# Altium PCB AT32UC3B0256 Breakout.PcbDoc
Units mm, origin at the board's own origin, x right, y up, seen from the top; angles counter-clockwise.
Board outline 50 x 50 mm, 2 copper layers (Top Layer, Bottom Layer); 24 components, 56 nets, 179 pads, 0 vias.
Unrouted connection lines stored in the file: 99.
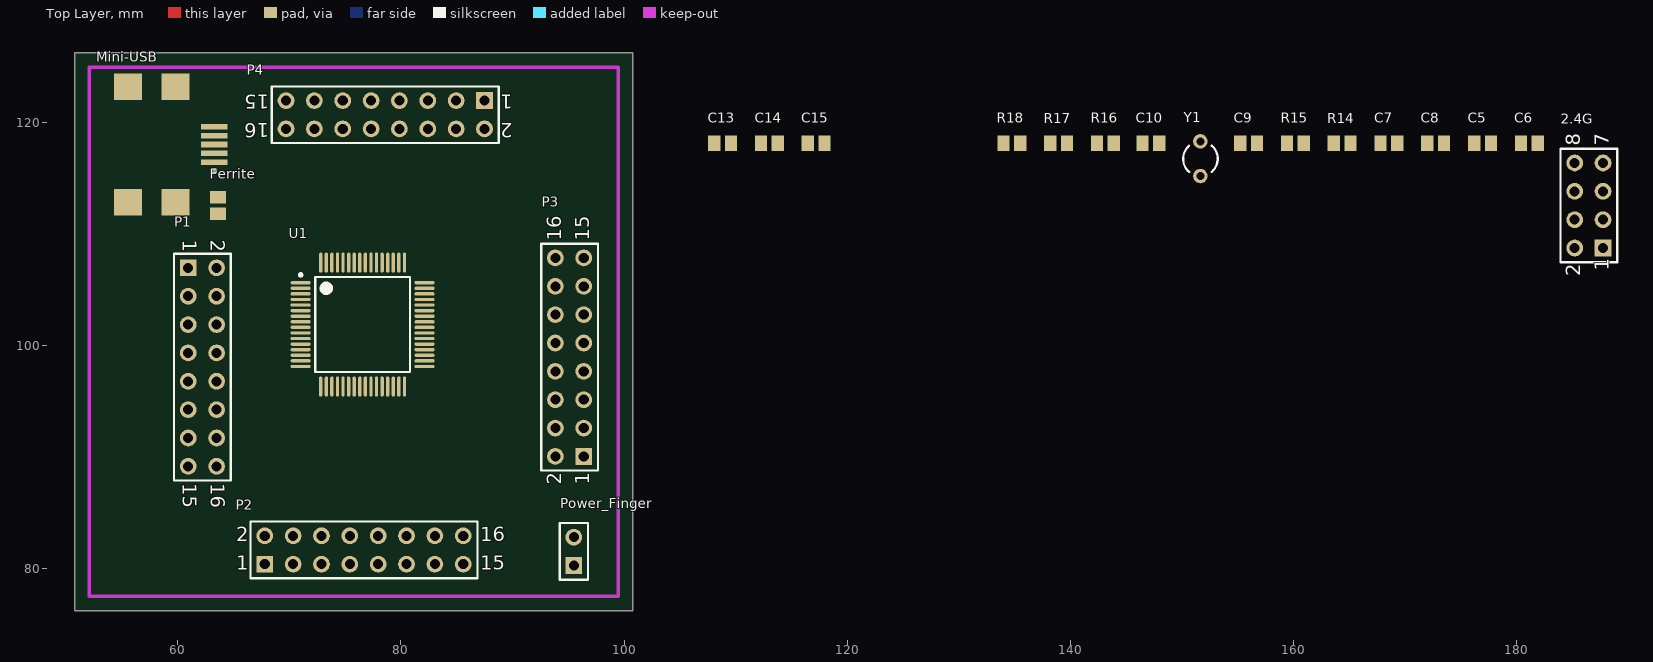
[diagram p0: Top Layer view]
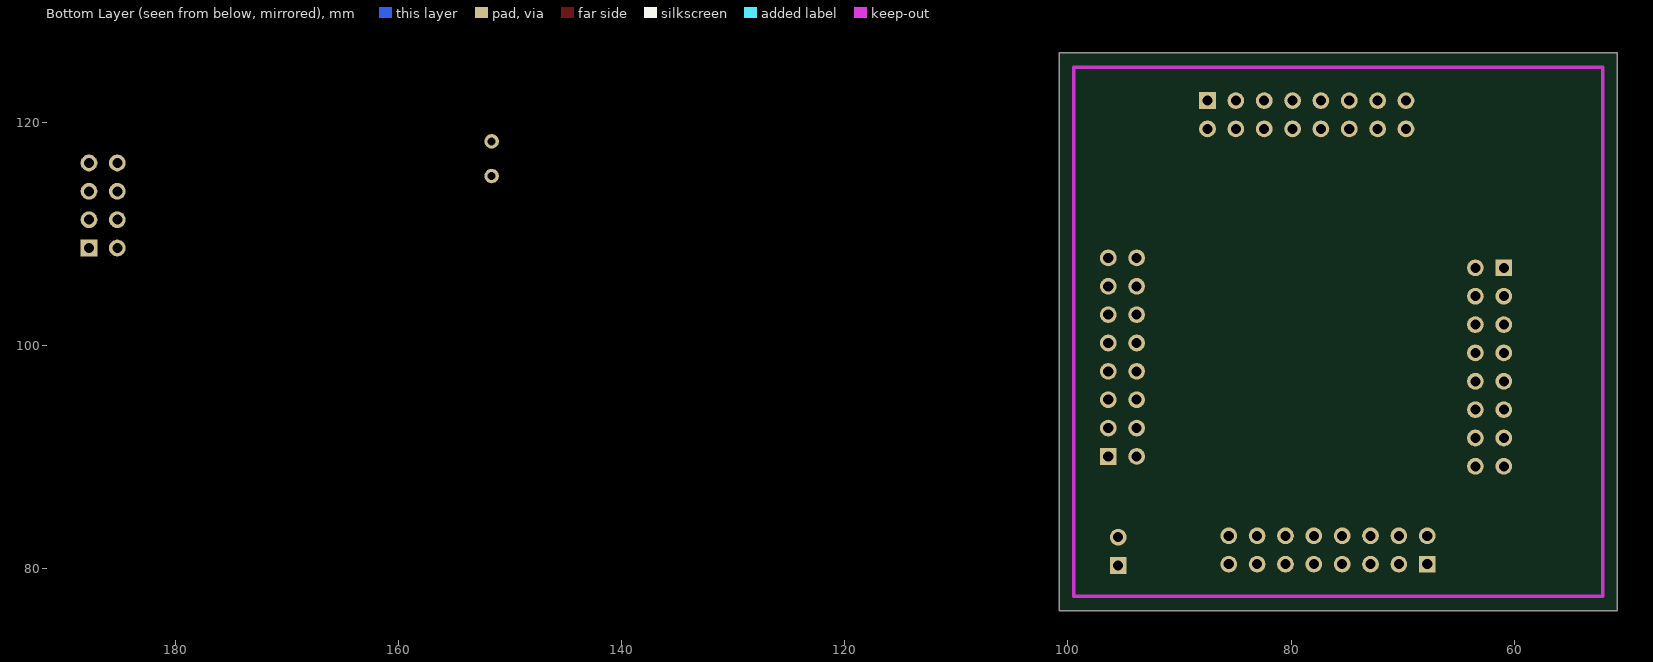
[diagram p1: Bottom Layer view, seen from below]

## Layer stack, top to bottom
Top Layer: signal copper 0.0356
Dielectric: dielectric 0.32, FR-4, Dk 4.8
Bottom Layer: signal copper 0.0356

## Board outline
50.8,76.2 100.8,76.2 100.8,126.2 50.8,126.2

## Design rules (kind name [scope] priority, off if disabled: settings)
Clearance "Polygon Clearance" [InPolygon] p1: gap=1.016
Clearance [All] p2: gap=0.206
HoleSize [All] p1: absolutevalues=TRUE maxlimit=2.54 minlimit=0.61 maxpercent=80.000 minpercent=20.000
PolygonConnect [All] p1: connectstyle=Relief reliefconductorwidth=0.254 reliefentries=4 polygonreliefangle="90 Angle"
RoomDefinition "U_AT32UC3B0256 Breakout" [InComponentClass('U_AT32UC3B0256 Breakout')] p1 off: confinementstyle=ConfineIn formatcopy=TRUE lockcomponents=FALSE outline 101.981,105.156 204.089,105.156 204.089,120.904 101.981,120.904
RoomDefinition "AT32UC3B0256 Breakout Top Assembly" [InComponentClass('AT32UC3B0256 Breakout Top Assembly')] p2 off: confinementstyle=ConfineIn formatcopy=TRUE lockcomponents=FALSE outline 101.981,77.724 137.16,77.724 137.16,104.013 101.981,104.013
RoutingVias [All] p1: holewidth=0.635 width=0.889 viastyle="Through Hole" minholewidth=0.635 minwidth=0.889 maxholewidth=0.635 maxwidth=0.889
SilkscreenOverComponentPads [All] p1: minsilkscreentomaskgap=0.254
SolderMaskExpansion [All] p1: expansion=0.102
Width [All] p1: maxlimit=1.27 minlimit=0.203 preferedwidth=0.203
26 further rules are at their usual default settings.

## Classes and differential pairs
net class PB[11..0]: PB0 PB1 PB2 PB3 PB4 PB5 PB6 PB7 PB8 PB9 PB10 PB11
net class PA[31..0]: PA0 PA1 PA2 PA3 PA4 PA5 PA6 PA7 PA8 PA9 PA10 PA11 PA12 PA13 PA14 PA15 PA16 PA17 PA18 PA19 PA20 PA21 PA22 PA23 PA24 PA25 PA26 PA27 PA28 PA29 PA30 PA31
component class "U_AT32UC3B0256 Breakout": 2.4G C5 C6 C7 C8 C9 C10 C13 C14 C15 Ferrite Mini-USB R14 R15 R16 R17 R18 U1 Y1
component class "AT32UC3B0256 Breakout Top Assembly": P1 P2 P3 P4 Power_Finger

## Components (designator, comment, footprint, x,y, rotation, side; value= is the part's Value field where it differs from the comment)
2.4G "Header 4X2" HDR2X4 187.706,108.712 r90 top
C5 "Cap Semi" CAPC2012L 176.911,118.11 r0 top
C6 "Cap Semi" CAPC2012L 181.102,118.11 r0 top
C7 "Cap Semi" CAPC2012L 168.529,118.11 r0 top
C8 "Cap Semi" CAPC2012L 172.72,118.11 r0 top
C9 "Cap Semi" CAPC2012L 155.956,118.11 r0 top
C10 "Cap Semi" CAPC2012L 147.193,118.11 r0 top
C13 "Cap Semi" CAPC2012L 108.839,118.11 r0 top
C14 "Cap Semi" CAPC2012L 113.03,118.11 r0 top
C15 "Cap Semi" CAPC2012L 117.221,118.11 r0 top
Ferrite "Ferrite Bead 1A" C0805 63.627,112.522 r90 top
Mini-USB "Mini USB" "Mini USB" 59.436,117.983 r180 top
P1 "Header 1-16" HDR2X8 60.96,106.934 r270 top
P2 "Header 17-32" HDR2X8 67.818,80.391 r0 top
P3 "Header 33-48" HDR2X8 96.393,90.043 r90 top
P4 "Header 49-64" HDR2X8 87.503,121.92 r180 top
Power_Finger "Header 2" HDR1X2 95.504,80.264 r90 top
R14 "Res3" C0805 164.338,118.11 r0 top
R15 "Res3" C0805 160.147,118.11 r0 top
R16 "Res3" C0805 143.129,118.11 r0 top
R17 "Res3" C0805 138.938,118.11 r0 top
R18 "Res3" C0805 134.747,118.11 r0 top
U1 "AT32UC3B0256-A2UT" TQFP64_N 76.581,101.854 r0 top
Y1 "XTAL 16Mhz" R38 151.638,116.713 r0 top

## Footprints (in the part's own frame and the unit in brackets; to place one, negate y for a bottom-side part, rotate by r counter-clockwise, add the part's x,y. Pads: shape width x height; smd on the part's side, far side on the other; paste and mask are expansions set on the pad)
C0805 [mm] "Chip Capacitor, Body 2.0x1.3mm, IPC High Density"
  rect 1.1x1.4 smd: 1(-0.75,0) 2(0.75,0)
  body extent -1.1,-0.72 1.1,0.72, height 1.4
CAPC2012L [mm] "Chip Capacitor, Body 2.0x1.3mm, IPC High Density"
  rect 1.1x1.4 smd: 1(-0.75,0) 2(0.75,0)
  body extent -1.1,-0.72 1.1,0.72, height 1.1
HDR1X2 [mm] "Connector; Header; 2 Position"
  rect 1.5x1.5 hole 0.9: 1(0,0)
  round 1.5 hole 0.9: 2(2.54,0)
  silkscreen extent -1.27,-1.27 3.81,1.27
HDR2X4 [mm] "Connector; Header; 4x2 Position"
  rect 1.5x1.5 hole 0.9: 1(0,0)
  round 1.5 hole 0.9: 2(0,2.54) 3(2.54,0) 4(2.54,2.54) 5(5.08,0) 6(5.08,2.54) 7(7.62,0) 8(7.62,2.54)
  silkscreen extent -1.27,-1.27 8.89,3.81
HDR2X8 [mm] "Connector; Header; 8x2 Position"
  rect 1.5x1.5 hole 0.9: 1(0,0)
  round 1.5 hole 0.9: 2(0,2.54) 3(2.54,0) 4(2.54,2.54) 5(5.08,0) 6(5.08,2.54) 7(7.62,0) 8(7.62,2.54) 9(10.16,0) 10(10.16,2.54) 11(12.7,0) 12(12.7,2.54) 13(15.24,0) 14(15.24,2.54) 15(17.78,0) 16(17.78,2.54)
  silkscreen extent -1.27,-1.27 19.05,3.81
"Mini USB" [mm] "Connector; USB Mini-B, Sinking Type, SM; 5 Position; Right Angle"
  rect 2.35x0.5 smd: 1(-3.862,1.6) 2(-3.862,0.8) 3(-3.862,0) 4(-3.862,-0.8) 5(-3.862,-1.6)
  rect 2.5x2.35 smd: MH1(-0.387,-5.175) MH2(3.863,-5.175) MH3(3.863,5.175) MH4(-0.387,5.175)
  silkscreen extent -3.99,2.28 -3.74,2.52, body extent -1.8,-3.84 6.8,3.86, height 2.54
R38 [mm] "Crystal, Thru-Hole; 2 Leads; Body 3.1 x 8.2 mm (Dia.xH)"
  round 1.3 hole 0.7: 1(0,1.55) 2(0,-1.55)
  silkscreen extent -1.55,-1.19 1.55,1.17
TQFP64_N [mm] "Thin QFP, 64-Leads, Body 10x10mm, Pitch 0.5mm, IPC Medium Density"
  oval 1.8x0.3 smd: 1(-5.55,3.75) 2(-5.55,3.25) 3(-5.55,2.75) 4(-5.55,2.25) 5(-5.55,1.75) 6(-5.55,1.25) 7(-5.55,0.75) 8(-5.55,0.25) 9(-5.55,-0.25) 10(-5.55,-0.75) 11(-5.55,-1.25) 12(-5.55,-1.75) 13(-5.55,-2.25) 14(-5.55,-2.75) 15(-5.55,-3.25) 16(-5.55,-3.75) 33(5.55,-3.75) 34(5.55,-3.25) 35(5.55,-2.75) 36(5.55,-2.25) 37(5.55,-1.75) 38(5.55,-1.25) 39(5.55,-0.75) 40(5.55,-0.25) 41(5.55,0.25) 42(5.55,0.75) 43(5.55,1.25) 44(5.55,1.75) 45(5.55,2.25) 46(5.55,2.75) 47(5.55,3.25) 48(5.55,3.75)
  oval 0.3x1.8 smd: 17(-3.75,-5.55) 18(-3.25,-5.55) 19(-2.75,-5.55) 20(-2.25,-5.55) 21(-1.75,-5.55) 22(-1.25,-5.55) 23(-0.75,-5.55) 24(-0.25,-5.55) 25(0.25,-5.55) 26(0.75,-5.55) 27(1.25,-5.55) 28(1.75,-5.55) 29(2.25,-5.55) 30(2.75,-5.55) 31(3.25,-5.55) 32(3.75,-5.55) 49(3.75,5.55) 50(3.25,5.55) 51(2.75,5.55) 52(2.25,5.55) 53(1.75,5.55) 54(1.25,5.55) 55(0.75,5.55) 56(0.25,5.55) 57(-0.25,5.55) 58(-0.75,5.55) 59(-1.25,5.55) 60(-1.75,5.55) 61(-2.25,5.55) 62(-2.75,5.55) 63(-3.25,5.55) 64(-3.75,5.55)
  silkscreen extent -5.67,-4.25 4.25,4.57, body extent -5,-5 5,5, height 1.2

## Part data
2.4G: "Header, 4-Pin, Dual row"
C5 C6 C7 C8 C9 C10 C13 C14 C15: "Capacitor (Semiconductor SIM Model)"
Ferrite: library part "Ferrite Bead"
P1 P2 P3 P4: library part "Header 8X2", "Header, 8-Pin, Dual row"
Power_Finger: "Header, 2-Pin"
R14 R15 R16 R17 R18: "Resistor"
U1: "32-bit AVR UC3 B Series Microcontroller, 256KB Flash, 32KB SRAM, 44 GPIO pins, Industrial Grade, 64-Pin TQFP, Tray"
Y1: library part XTAL, "Crystal Oscillator"

## Nets (pads, with @x,y where several pads share a name; then routed paths per layer and width w, separated by ;. In a path a pad name is that pad's centre, name@x,y a point inside that pad or via, vN(x,y) a via of type N, cw(c..) or ccw(c..) an arc to the next point about the centre after c; other vN are vias at no path point)
3.3VCC: 2.4G.2 C5.2 C6.2 Power_Finger.2 R14.2 R15.2 R18.1 U1.18 U1.19 U1.21 U1.32 U1.48 U1.64
GND: 2.4G.1 C5.1 C6.1 C7.1 C8.1 C9.1 C10.1 C13.2 C14.2 C15.2 Mini-USB.5 Power_Finger.1 U1.1 U1.17 U1.23 U1.49
IRQ: 2.4G.8
JTAG_TCK: U1.2
NetC7_2: C7.2 C8.2 U1.8 U1.20 U1.22 U1.53 U1.56
NetC13_1: C13.1 Ferrite.1 Mini-USB.1
NetR16_2: R16.2 U1.50
NetR17_2: R17.2 U1.51
NetR18_2: R18.2 U1.63
PA0: P1.3 U1.3
PA1: P1.4 U1.4
PA2: P1.5 U1.5
PA3: Mini-USB.4 P1.9 U1.9
PA4: P1.10 U1.10
PA5: P1.11 U1.11
PA6: P1.12 U1.12
PA7: P1.13 U1.13
PA8: P1.14 U1.14
PA9: P2.12 R14.1 U1.28
PA10: P2.13 R15.1 U1.29
PA11: P2.14 U1.30
PA12: P2.15 U1.31
PA13: P3.1 U1.33
PA14: 2.4G.6 P3.2 U1.34
PA15: 2.4G.5 P3.3 U1.35
PA16: 2.4G.4 P3.4 U1.36
PA17: P3.5 U1.37
PA18: C9.2 P3.7 U1.39 Y1.2
PA19: C10.2 P3.8 U1.40 Y1.1
PA20: P3.12 U1.44
PA21: P3.13 U1.45
PA22: P3.14 U1.46
PA23: P3.15 U1.47
PA24: P4.11 U1.59
PA25: P4.12 U1.60
PA26: P4.13 U1.61
PA27: P4.14 U1.62
PA28: 2.4G.7 P3.9 U1.41
PA29: P3.10 U1.42
PA30: P1.15 U1.15
PA31: P1.16 U1.16
PB0: P1.6 U1.6
PB1: P1.7 U1.7
PB2: P2.8 U1.24
PB3: P2.9 U1.25
PB4: P2.10 U1.26
PB5: P2.11 U1.27
PB6: 2.4G.3 P3.6 U1.38
PB7: P3.11 U1.43
PB8: P4.6 U1.54
PB9: P4.7 U1.55
PB10: P4.9 U1.57
PB11: P4.10 U1.58
USBDM: Mini-USB.2 R17.1
USBDP: Mini-USB.3 R16.1
VBUS: C14.1 C15.1 Ferrite.2 U1.52
pads on no net: Mini-USB.MH1 Mini-USB.MH2 Mini-USB.MH3 Mini-USB.MH4 P1.1 P1.2 P1.8 P2.1 P2.2 P2.3 P2.4 P2.5 P2.6 P2.7 P2.16 P3.16 P4.1 P4.2 P4.3 P4.4 P4.5 P4.8 P4.15 P4.16

## Keep-outs
Keep-Out Layer:
  lines w0.3: 52.1,77.5 52.1,124.9 99.5,124.9 99.5,77.5 52.1,77.5

## Silkscreen, mask and mechanical layers (free items; w line width, h text height)
Drill Drawing:
  text ".LEGEND" at 105.88,81.28 h1.52
  text "Drill Drawing." at 105.88,78.74 h1.52

## Dimensions
52.1,77.5 to 52.1,124.9 on Mechanical 1
52.1,77.5 to 99.5,77.5 on Mechanical 1

## Text inside footprints (layer, text, board x,y; h text height)
2.4G: Top Overlay "2" at 185.674,106.172 h1.27 r90; Top Overlay "1" at 188.214,106.68 h1.27 r90; Top Overlay "7" at 188.214,117.856 h1.27 r90; Top Overlay "8" at 185.674,117.856 h1.27 r90
P1: Top Overlay "2" at 62.992,109.474 h1.27 r270; Top Overlay "1" at 60.452,109.474 h1.27 r270; Top Overlay "15" at 60.452,87.63 h1.27 r270; Top Overlay "16" at 62.992,87.63 h1.27 r270
P2: Top Overlay "2" at 65.278,82.423 h1.27; Top Overlay "1" at 65.278,79.883 h1.27; Top Overlay "15" at 87.122,79.883 h1.27; Top Overlay "16" at 87.122,82.423 h1.27
P3: Top Overlay "2" at 94.361,87.503 h1.27 r90; Top Overlay "1" at 96.901,87.503 h1.27 r90; Top Overlay "15" at 96.901,109.347 h1.27 r90; Top Overlay "16" at 94.361,109.347 h1.27 r90
P4: Top Overlay "2" at 90.043,119.888 h1.27 r180; Top Overlay "1" at 90.043,122.428 h1.27 r180; Top Overlay "15" at 68.199,122.428 h1.27 r180; Top Overlay "16" at 68.199,119.888 h1.27 r180